# EAGLE board KramerMC_BUS_ferryTALE2020 (EAGLE 6.6.0)
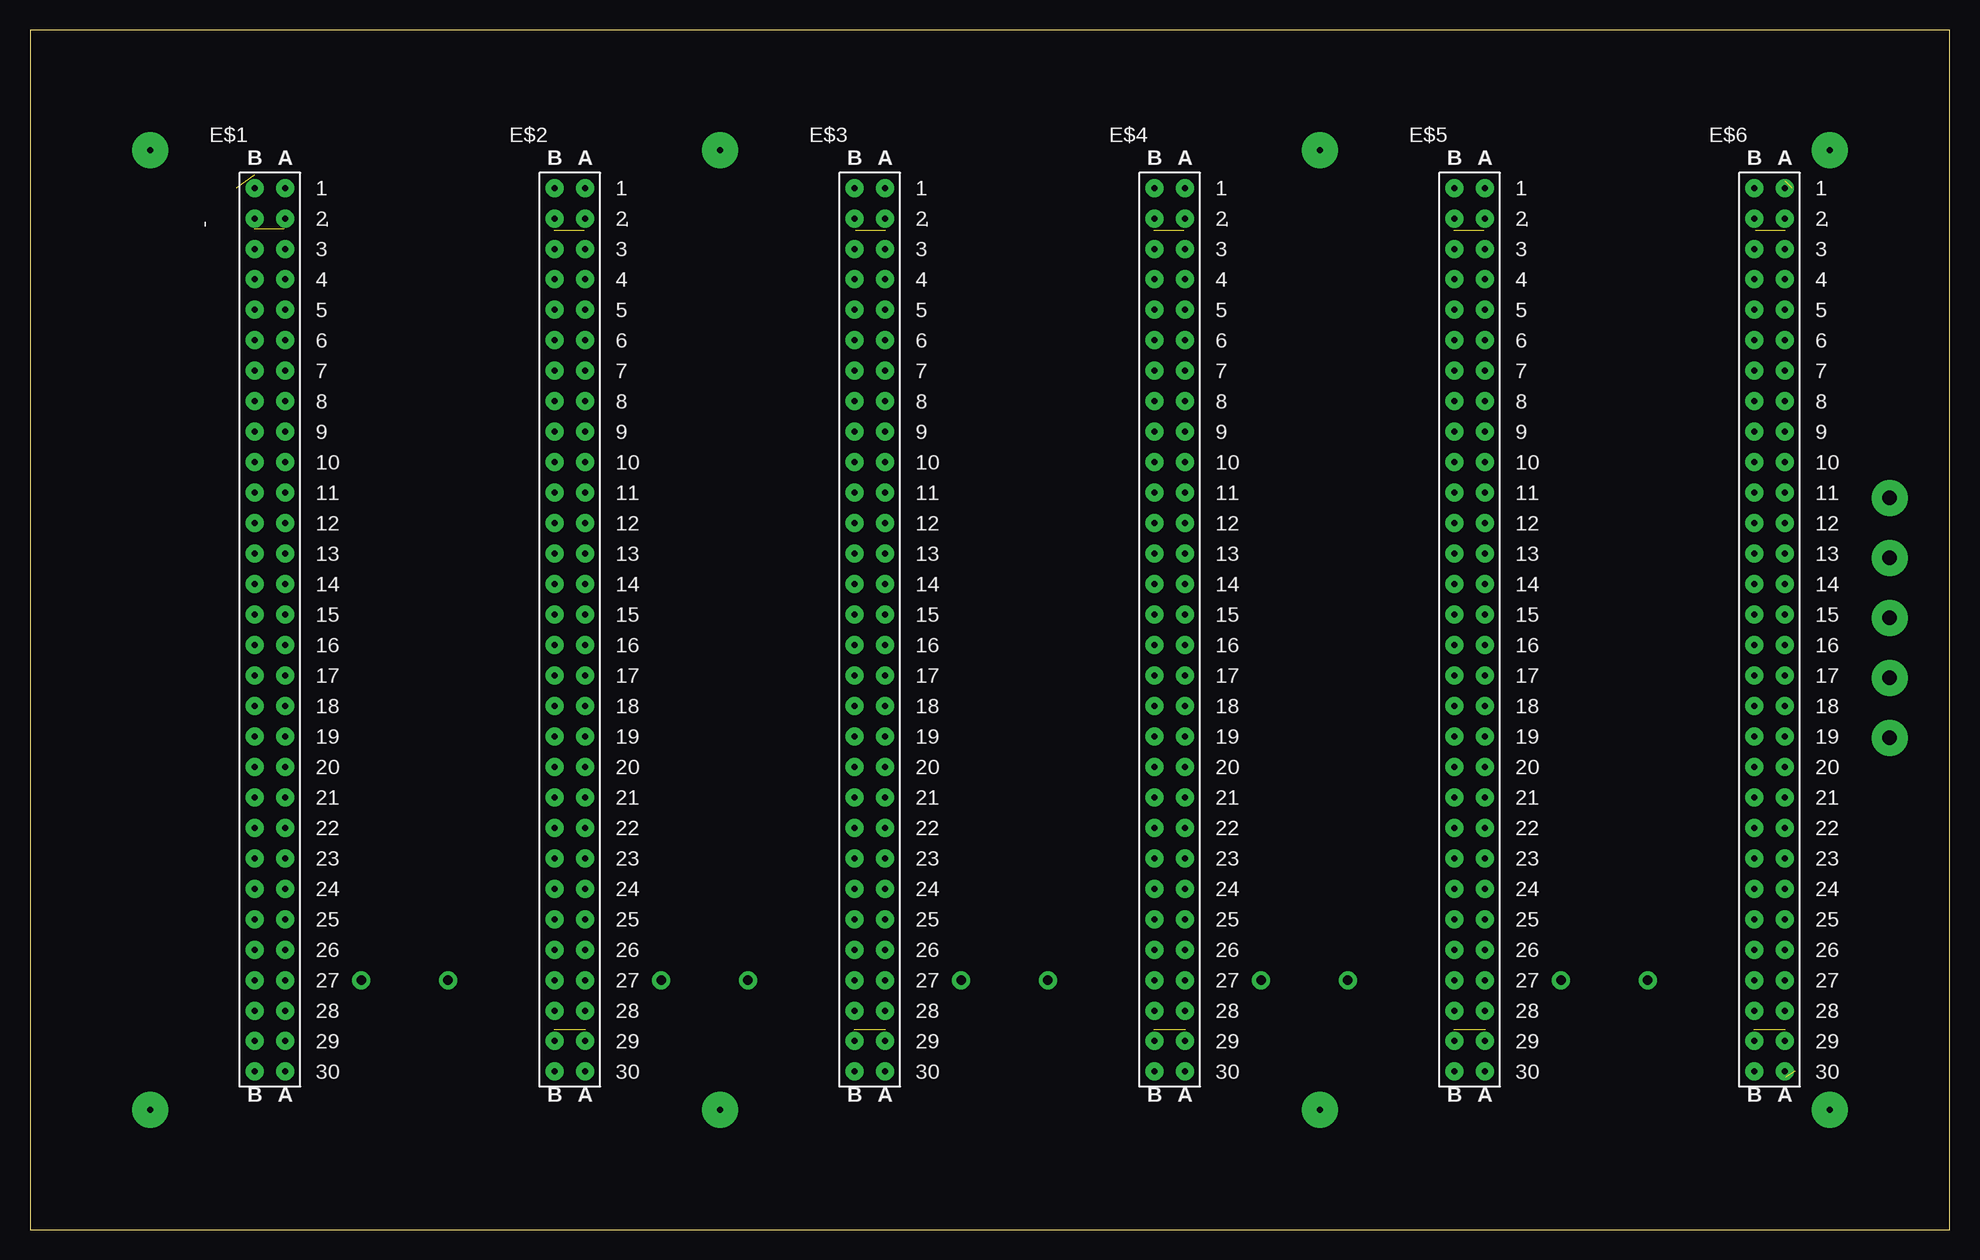
[diagram p0: board, top side]
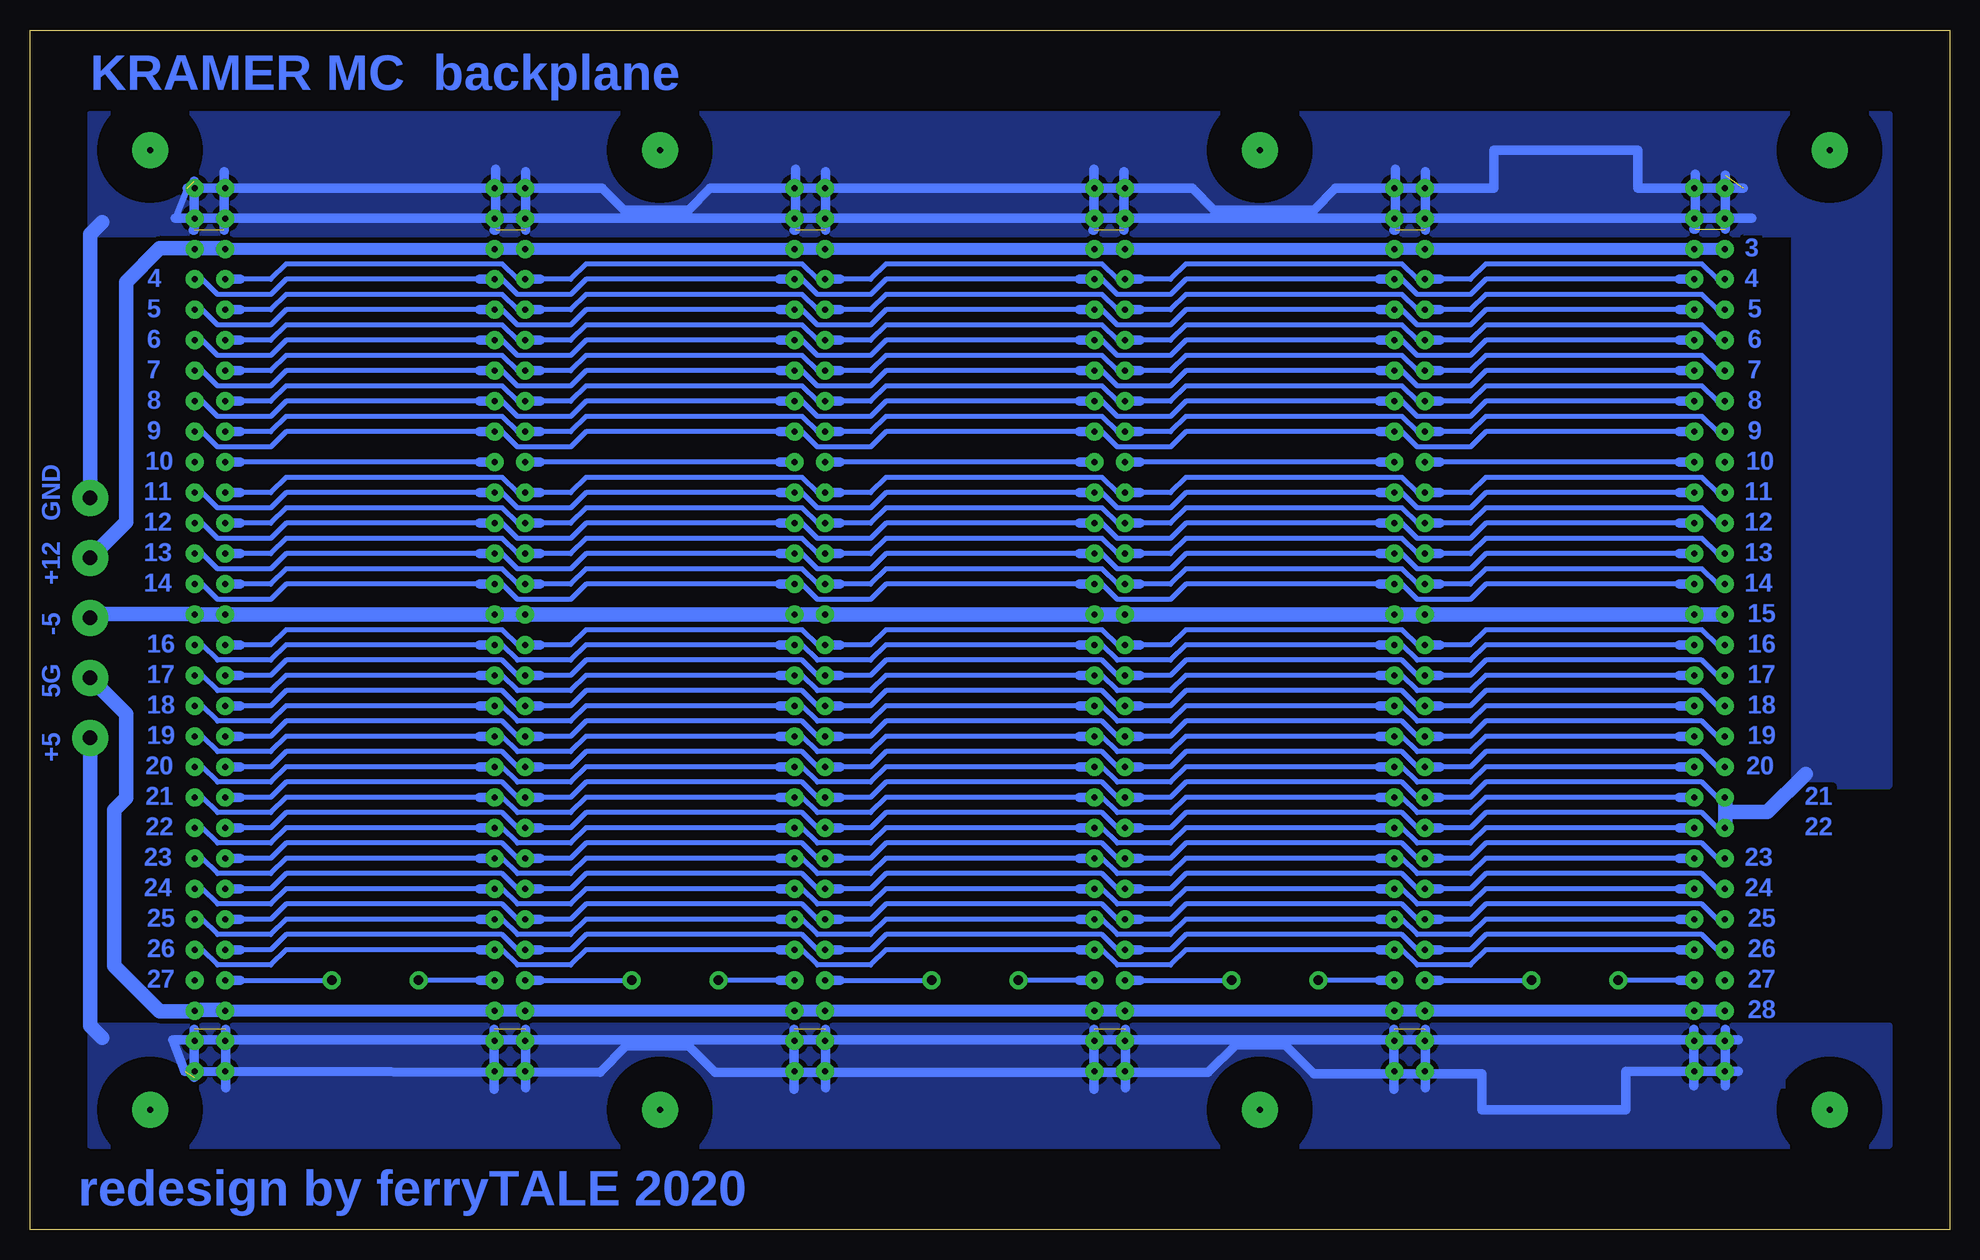
[diagram p1: board, bottom side, seen from below]

Size 160 x 100 mm. Coordinates in mm from the lower left corner, seen from the top.
Outline: 0,0 160,0 160,100 0,100 0,0
Copper layers (1*16): Top 0.035mm / dielectric 1.5mm / Bottom 0.035mm
Design rules "default *": minimum track width 10mil, minimum drill 24mil, track to track 8mil, track to pad 8mil, pad to pad 8mil, via to via 8mil, smd to smd 8mil, copper to edge 40mil, drill to drill 8mil, minimum pad ring 10mil, minimum via ring 8mil, stop-mask expansion 4mil, vias tented up to drill 0mil, thermal gap 10mil
bRestrict: area 6,6 to 14,14; area 146,6 to 154,14; area 146,86 to 154,94; area 6,86 to 14,94; area 103.5,86 to 111.5,94; area 53.5,86 to 61.5,94; area 103.5,6 to 111.5,14; area 53.5,6 to 61.5,14

## Footprints (pad centres in the part's own frame; a part is rotated, then mirrored left to right if it is on the bottom)
FE30-2 = drill 0.5 pad 1.5: A1 -36.83,1.27; A2 -34.29,1.27; A3 -31.75,1.27; A4 -29.21,1.27; A5 -26.67,1.27; A6 -24.13,1.27; A7 -21.59,1.27; A8 -19.05,1.27; A9 -16.51,1.27; A10 -13.97,1.27; A11 -11.43,1.27; A12 -8.89,1.27; A13 -6.35,1.27; A14 -3.81,1.27; A15 -1.27,1.27; A16 1.27,1.27; A17 3.81,1.27; A18 6.35,1.27; A19 8.89,1.27; A20 11.43,1.27; A21 13.97,1.27; A22 16.51,1.27; A23 19.05,1.27; A24 21.59,1.27; A25 24.13,1.27; A26 26.67,1.27; A27 29.21,1.27; A28 31.75,1.27; A29 34.29,1.27; A30 36.83,1.27; B1 -36.83,-1.27; B2 -34.29,-1.27; B3 -31.75,-1.27; B4 -29.21,-1.27; B5 -26.67,-1.27; B6 -24.13,-1.27; B7 -21.59,-1.27; B8 -19.05,-1.27; B9 -16.51,-1.27; B10 -13.97,-1.27; B11 -11.43,-1.27; B12 -8.89,-1.27; B13 -6.35,-1.27; B14 -3.81,-1.27; B15 -1.27,-1.27; B16 1.27,-1.27; B17 3.81,-1.27; B18 6.35,-1.27; B19 8.89,-1.27; B20 11.43,-1.27; B21 13.97,-1.27; B22 16.51,-1.27; B23 19.05,-1.27; B24 21.59,-1.27; B25 24.13,-1.27; B26 26.67,-1.27; B27 29.21,-1.27; B28 31.75,-1.27; B29 34.29,-1.27; B30 36.83,-1.27

## Placement (x,y rotation side)
E$1  [FE30-2]  20,50 270 top
E$2  [FE30-2]  45,50 270 top
E$3  [FE30-2]  70,50 270 top
E$4  [FE30-2]  95,50 270 top
E$5  [FE30-2]  120,50 270 top
E$6  [FE30-2]  145,50 270 top

## Library data of the parts
E$1-E$6 = ferry_Kramer_KC

## Tracks (layer width: path | path; a pad name or v marks a point on that pad's centre or on a via)
+5V  (via drill 1.2 pad 3)  (6 unrouted)
  Bottom 0.8: 18.7,16.7 18.7,12 | 21.3,16.7 21.3,12 | 43.7,16.7 43.7,11.8 | 46.3,16.7 46.3,11.7 | 68.7,16.7 68.7,11.8 | 71.3,16.7 71.3,11.7 | 93.7,16.7 93.7,11.8 | 96.3,16.7 96.3,11.7 | 118.7,16.7 118.7,11.8 | 121.3,16.7 121.3,11.7 | 143.7,16.7 143.7,11.8 | 146.3,16.7 146.3,12.7 | 17.6,15.8 148.1,15.8 147.1,13.2 112.5,13.1 110.3,15.3 105.1,15.3 102.9,13.1 61.8,13.1 59.5,15.4 55.4,15.4 53,13 39,13 39,10 27,10 27,13.2 17.6,13.2
  Bottom 1.2: v155,41 155,17 154,16
  pour Bottom (isolate 0.4, rank 6, no thermals): 5,17 155,17 155,7 5,7
  pour Bottom (rank 6, no thermals): 13.7,17.2 17.7,17.2 17.7,11.8 13.7,11.8
  pour Bottom (rank 6, no thermals): 17.3,12.1 22.8,12.1 22.8,8.4 17.3,8.4
  pour Bottom (rank 6, no thermals): 28,16 38,16 38,11 28,11
GND  (via drill 1.2 pad 3)  (8 unrouted)
  Bottom 0.5: 146.9,86.8 147.9,84.3
  Bottom 0.8: 17.2,86.8 26,86.8 26,90 38,90 38,86.8 51.2,86.8 53,85 61.3,85 63.1,86.8 103.3,86.8 105.1,85 110.5,85 112.3,86.8 146.9,86.8 | 147.9,84.3 16.5,84.3 | 18.7,83.4 18.7,87.9 | 21.3,83.4 21.2,83.4 21.2,88 | 43.7,83.3 43.7,88.2 | 46.3,83.3 46.2,83.3 46.2,88.4 | 68.8,83.3 68.8,88.2 | 71.4,83.3 71.3,83.3 71.3,88.4 | 93.7,83.3 93.7,88.2 | 96.3,83.3 96.2,83.3 96.2,88.4 | 118.7,83.3 118.7,88.2 | 121.3,83.3 121.2,83.3 121.2,88.4 | 143.8,83.3 143.8,88.2 | 146.4,83.3 146.3,83.3 146.3,87.4
  Bottom 1.2: v155,61 155,83 154,84 | 18.7,33.5 18.7,34.8 | 18.7,34.8 18.7,36 | 18.7,34.8 15.2,34.8 12,38
  pour Bottom (isolate 0.4, rank 6, no thermals): 5,93 155,93 155,83 13,83 13,37 5,37
  pour Bottom (rank 6, no thermals): 22.6,91.4 15.8,91.4 15.8,89.8 14,88 13.8,83.1 13.8,82.9 17.1,82.9 17.1,88.3 22.6,88.3
  pour Bottom (rank 6, no thermals): 27,89 37,89 37,84 27,84
S$1
  Bottom 1: 18.73,81.75 21.27,81.75 43.73,81.75
S$2
  Bottom 1: 18.73,18.25 21.27,18.25 43.73,18.25
S$3
  Bottom 0.4: 22.54,63.97 42.46,63.97
  Bottom 0.8: 21.27,63.97 22.54,63.97 | 42.46,63.97 43.73,63.97
S$4  (via drill 0.8 pad 1.5)
  Bottom 0.4: 22.54,20.79 v27.62,20.79
  Bottom 0.8: 21.27,20.79 22.54,20.79
S$5  (via drill 0.8 pad 1.5)
  Bottom 0.4: 42.46,20.79 v34.84,20.79
  Bottom 0.8: 43.73,20.79 42.46,20.79
S$6
  Bottom 0.4: 18.73,79.21 19.36,79.21 20.64,80.48 38.65,80.48 39.92,79.21 42.46,79.21
  Bottom 0.8: 43.73,79.21 42.46,79.21
S$7
  Bottom 0.4: 46.27,79.21 45.63,79.21 44.37,77.94 39.92,77.94 38.65,79.21 22.54,79.21
  Bottom 0.8: 21.27,79.21 22.54,79.21
S$8
  Bottom 0.4: 18.73,76.67 19.36,76.67 20.64,77.94 38.65,77.94 39.92,76.67 42.46,76.67
  Bottom 0.8: 43.73,76.67 42.46,76.67
S$9
  Bottom 0.4: 46.27,76.67 45.63,76.67 44.37,75.4 39.92,75.4 38.65,76.67 22.54,76.67
  Bottom 0.8: 21.27,76.67 22.54,76.67
S$10
  Bottom 0.4: 18.73,74.13 19.36,74.13 20.64,75.4 38.65,75.4 39.92,74.13 42.46,74.13
  Bottom 0.8: 43.73,74.13 42.46,74.13
S$11
  Bottom 0.4: 46.27,74.13 45.63,74.13 44.37,72.86 39.92,72.86 38.65,74.13 22.54,74.13
  Bottom 0.8: 21.27,74.13 22.54,74.13
S$12
  Bottom 0.4: 18.73,71.59 19.36,71.59 20.64,72.86 38.65,72.86 39.92,71.59 42.46,71.59
  Bottom 0.8: 43.73,71.59 42.46,71.59
S$13
  Bottom 0.4: 46.27,71.59 45.63,71.59 44.37,70.32 39.92,70.32 38.65,71.59 22.54,71.59
  Bottom 0.8: 21.27,71.59 22.54,71.59
S$14
  Bottom 0.4: 18.73,69.05 19.36,69.05 20.64,70.32 38.65,70.32 39.92,69.05 42.46,69.05
  Bottom 0.8: 43.73,69.05 42.46,69.05
S$15
  Bottom 0.4: 46.27,69.05 45.63,69.05 44.37,67.78 39.92,67.78 38.65,69.05 22.54,69.05
  Bottom 0.8: 21.27,69.05 22.54,69.05
S$16
  Bottom 0.4: 18.73,66.51 19.36,66.51 20.64,67.78 38.65,67.78 39.92,66.51 42.46,66.51
  Bottom 0.8: 43.73,66.51 42.46,66.51
S$17
  Bottom 0.4: 46.27,66.51 45.63,66.51 44.37,65.24 39.92,65.24 38.65,66.51 22.54,66.51
  Bottom 0.8: 21.27,66.51 22.54,66.51
S$18
  Bottom 0.4: 18.73,61.43 19.36,61.43 20.64,62.7 38.65,62.7 39.92,61.43 42.46,61.43
  Bottom 0.8: 43.73,61.43 42.46,61.43
S$19
  Bottom 0.4: 46.27,61.43 45.63,61.43 44.37,60.16 39.92,60.16 38.65,61.43 22.54,61.43
  Bottom 0.8: 21.27,61.43 22.54,61.43
S$20
  Bottom 0.4: 18.73,58.89 19.36,58.89 20.64,60.16 38.65,60.16 39.92,58.89 42.46,58.89
  Bottom 0.8: 43.73,58.89 42.46,58.89
S$21
  Bottom 0.4: 46.27,58.89 45.63,58.89 44.37,57.62 39.92,57.62 38.65,58.89 22.54,58.89
  Bottom 0.8: 21.27,58.89 22.54,58.89
S$22
  Bottom 0.4: 18.73,56.35 19.36,56.35 20.64,57.62 38.65,57.62 39.92,56.35 42.46,56.35
  Bottom 0.8: 43.73,56.35 42.46,56.35
S$23
  Bottom 0.4: 46.27,56.35 45.63,56.35 44.37,55.08 39.92,55.08 38.65,56.35 22.54,56.35
  Bottom 0.8: 21.27,56.35 22.54,56.35
S$24
  Bottom 0.4: 18.73,53.81 19.36,53.81 20.64,55.08 38.65,55.08 39.92,53.81 42.46,53.81
  Bottom 0.8: 43.73,53.81 42.46,53.81
S$25
  Bottom 0.4: 46.27,53.81 45.63,53.81 44.37,52.54 39.92,52.54 38.65,53.81 22.54,53.81
  Bottom 0.8: 21.27,53.81 22.54,53.81
S$26  (via drill 1.2 pad 3)
  Bottom 1.2: 18.73,51.27 146.27,51.27 146.3,51.3 154.7,51.3 v155,51
S$27
  Bottom 0.4: 18.73,36.03 19.36,36.03 20.64,37.3 38.65,37.3 39.92,36.03 42.46,36.03
  Bottom 0.8: 43.73,36.03 42.46,36.03
S$28
  Bottom 0.4: 18.73,48.73 19.36,48.73 20.64,50 38.65,50 39.92,48.73 42.46,48.73
  Bottom 0.8: 43.73,48.73 42.46,48.73
S$29
  Bottom 0.4: 46.27,48.73 45.63,48.73 44.37,47.46 39.92,47.46 38.65,48.73 22.54,48.73
  Bottom 0.8: 21.27,48.73 22.54,48.73
S$30
  Bottom 0.4: 18.73,46.19 19.36,46.19 20.64,47.46 38.65,47.46 39.92,46.19 42.46,46.19
  Bottom 0.8: 43.73,46.19 42.46,46.19
S$31
  Bottom 0.4: 46.27,46.19 45.63,46.19 44.37,44.92 39.92,44.92 38.65,46.19 22.54,46.19
  Bottom 0.8: 21.27,46.19 22.54,46.19
S$32
  Bottom 0.4: 18.73,43.65 19.36,43.65 20.64,44.92 38.65,44.92 39.92,43.65 42.46,43.65
  Bottom 0.8: 43.73,43.65 42.46,43.65
S$33
  Bottom 0.4: 46.27,43.65 45.63,43.65 44.37,42.38 39.92,42.38 38.65,43.65 22.54,43.65
  Bottom 0.8: 21.27,43.65 22.54,43.65
S$34
  Bottom 0.4: 18.73,41.11 19.36,41.11 20.64,42.38 38.65,42.38 39.92,41.11 42.46,41.11
  Bottom 0.8: 43.73,41.11 42.46,41.11
S$35
  Bottom 0.4: 46.27,41.11 45.63,41.11 44.37,39.84 39.92,39.84 38.65,41.11 22.54,41.11
  Bottom 0.8: 21.27,41.11 22.54,41.11
S$36
  Bottom 0.4: 18.73,38.57 19.36,38.57 20.64,39.84 38.65,39.84 39.92,38.57 42.46,38.57
  Bottom 0.8: 43.73,38.57 42.46,38.57
S$37
  Bottom 0.4: 46.27,38.57 45.63,38.57 44.37,37.3 39.92,37.3 38.65,38.57 22.54,38.57
  Bottom 0.8: 21.27,38.57 22.54,38.57
S$38
  Bottom 0.4: 18.73,30.95 19.36,30.95 20.64,32.22 38.65,32.22 39.92,30.95 42.46,30.95
  Bottom 0.8: 43.73,30.95 42.46,30.95
S$39
  Bottom 0.4: 46.27,36.03 45.63,36.03 44.37,34.76 39.92,34.76 38.65,36.03 22.54,36.03
  Bottom 0.8: 21.27,36.03 22.54,36.03
S$40
  Bottom 1: 43.73,81.75 46.27,81.75 68.73,81.75
S$41
  Bottom 0.4: 46.27,33.49 45.63,33.49 44.37,32.22 39.92,32.22 38.65,33.49 22.54,33.49
  Bottom 0.8: 21.27,33.49 22.54,33.49
S$42
  Bottom 1: 43.73,18.25 46.27,18.25 68.73,18.25
S$43
  Bottom 0.4: 46.27,30.95 45.63,30.95 44.37,29.68 39.92,29.68 38.65,30.95 22.54,30.95
  Bottom 0.8: 21.27,30.95 22.54,30.95
S$44
  Bottom 0.4: 18.73,28.41 19.36,28.41 20.64,29.68 38.65,29.68 39.92,28.41 42.46,28.41
  Bottom 0.8: 43.73,28.41 42.46,28.41
S$45
  Bottom 0.4: 46.27,28.41 45.63,28.41 44.37,27.14 39.92,27.14 38.65,28.41 22.54,28.41
  Bottom 0.8: 21.27,28.41 22.54,28.41
S$46
  Bottom 0.4: 18.73,25.87 19.36,25.87 20.64,27.14 38.65,27.14 39.92,25.87 42.46,25.87
  Bottom 0.8: 43.73,25.87 42.46,25.87
S$47
  Bottom 0.4: 46.27,25.87 45.63,25.87 44.37,24.6 39.92,24.6 38.65,25.87 22.54,25.87
  Bottom 0.8: 21.27,25.87 22.54,25.87
S$48
  Bottom 0.4: 18.73,23.33 19.36,23.33 20.64,24.6 38.65,24.6 39.92,23.33 42.46,23.33
  Bottom 0.8: 43.73,23.33 42.46,23.33
S$49
  Bottom 0.4: 46.27,23.33 45.63,23.33 44.37,22.06 39.92,22.06 38.65,23.33 22.54,23.33
  Bottom 0.8: 21.27,23.33 22.54,23.33
S$50
  Bottom 0.4: 47.54,63.97 67.46,63.97
  Bottom 0.8: 46.27,63.97 47.54,63.97 | 67.46,63.97 68.73,63.97
S$51  (via drill 0.8 pad 1.5)
  Bottom 0.4: 47.54,20.79 v52.62,20.79
  Bottom 0.8: 46.27,20.79 47.54,20.79
S$52  (via drill 0.8 pad 1.5)
  Bottom 0.4: 67.46,20.79 v59.84,20.79
  Bottom 0.8: 68.73,20.79 67.46,20.79
S$53
  Bottom 0.4: 43.73,79.21 44.37,79.21 45.63,80.48 63.65,80.48 64.92,79.21 67.46,79.21
  Bottom 0.8: 68.73,79.21 67.46,79.21
S$54
  Bottom 0.4: 71.27,79.21 70.64,79.21 69.36,77.94 64.92,77.94 63.65,79.21 47.54,79.21
  Bottom 0.8: 46.27,79.21 47.54,79.21
S$55
  Bottom 0.4: 43.73,76.67 44.37,76.67 45.63,77.94 63.65,77.94 64.92,76.67 67.46,76.67
  Bottom 0.8: 68.73,76.67 67.46,76.67
S$56
  Bottom 0.4: 71.27,76.67 70.64,76.67 69.36,75.4 64.92,75.4 63.65,76.67 47.54,76.67
  Bottom 0.8: 46.27,76.67 47.54,76.67
S$57
  Bottom 0.4: 43.73,74.13 44.37,74.13 45.63,75.4 63.65,75.4 64.92,74.13 67.46,74.13
  Bottom 0.8: 68.73,74.13 67.46,74.13
S$58
  Bottom 0.4: 71.27,74.13 70.64,74.13 69.36,72.86 64.92,72.86 63.65,74.13 47.54,74.13
  Bottom 0.8: 46.27,74.13 47.54,74.13
S$59
  Bottom 0.4: 43.73,71.59 44.37,71.59 45.63,72.86 63.65,72.86 64.92,71.59 67.46,71.59
  Bottom 0.8: 68.73,71.59 67.46,71.59
S$60
  Bottom 0.4: 71.27,71.59 70.64,71.59 69.36,70.32 64.92,70.32 63.65,71.59 47.54,71.59
  Bottom 0.8: 46.27,71.59 47.54,71.59
S$61
  Bottom 0.4: 43.73,69.05 44.37,69.05 45.63,70.32 63.65,70.32 64.92,69.05 67.46,69.05
  Bottom 0.8: 68.73,69.05 67.46,69.05
S$62
  Bottom 0.4: 71.27,69.05 70.64,69.05 69.36,67.78 64.92,67.78 63.65,69.05 47.54,69.05
  Bottom 0.8: 46.27,69.05 47.54,69.05
S$63
  Bottom 0.4: 43.73,66.51 44.37,66.51 45.63,67.78 63.65,67.78 64.92,66.51 67.46,66.51
  Bottom 0.8: 68.73,66.51 67.46,66.51
S$64
  Bottom 0.4: 71.27,66.51 70.64,66.51 69.36,65.24 64.92,65.24 63.65,66.51 47.54,66.51
  Bottom 0.8: 46.27,66.51 47.54,66.51
S$65
  Bottom 0.4: 43.73,61.43 44.37,61.43 45.63,62.7 63.65,62.7 64.92,61.43 67.46,61.43
  Bottom 0.8: 68.73,61.43 67.46,61.43
S$66
  Bottom 0.4: 71.27,61.43 70.64,61.43 69.36,60.16 64.92,60.16 63.65,61.43 47.54,61.43
  Bottom 0.8: 46.27,61.43 47.54,61.43
S$67
  Bottom 0.4: 43.73,58.89 44.37,58.89 45.63,60.16 63.65,60.16 64.92,58.89 67.46,58.89
  Bottom 0.8: 68.73,58.89 67.46,58.89
S$68
  Bottom 0.4: 71.27,58.89 70.64,58.89 69.36,57.62 64.92,57.62 63.65,58.89 47.54,58.89
  Bottom 0.8: 46.27,58.89 47.54,58.89
S$69
  Bottom 0.4: 43.73,56.35 44.37,56.35 45.63,57.62 63.65,57.62 64.92,56.35 67.46,56.35
  Bottom 0.8: 68.73,56.35 67.46,56.35
S$70
  Bottom 0.4: 71.27,56.35 70.64,56.35 69.36,55.08 64.92,55.08 63.65,56.35 47.54,56.35
  Bottom 0.8: 46.27,56.35 47.54,56.35
S$71
  Bottom 0.4: 43.73,53.81 44.37,53.81 45.63,55.08 63.65,55.08 64.92,53.81 67.46,53.81
  Bottom 0.8: 68.73,53.81 67.46,53.81
S$72
  Bottom 0.4: 71.27,53.81 70.64,53.81 69.36,52.54 64.92,52.54 63.65,53.81 47.54,53.81
  Bottom 0.8: 46.27,53.81 47.54,53.81
S$73
  Bottom 0.4: 18.73,33.49 19.36,33.49 20.64,34.76 38.65,34.76 39.92,33.49 42.46,33.49
  Bottom 0.8: 43.73,33.49 42.46,33.49
S$74
  Bottom 0.4: 43.73,36.03 44.37,36.03 45.63,37.3 63.65,37.3 64.92,36.03 67.46,36.03
  Bottom 0.8: 68.73,36.03 67.46,36.03
S$75
  Bottom 0.4: 43.73,48.73 44.37,48.73 45.63,50 63.65,50 64.92,48.73 67.46,48.73
  Bottom 0.8: 68.73,48.73 67.46,48.73
S$76
  Bottom 0.4: 71.27,48.73 70.64,48.73 69.36,47.46 64.92,47.46 63.65,48.73 47.54,48.73
  Bottom 0.8: 46.27,48.73 47.54,48.73
S$77
  Bottom 0.4: 43.73,46.19 44.37,46.19 45.63,47.46 63.65,47.46 64.92,46.19 67.46,46.19
  Bottom 0.8: 68.73,46.19 67.46,46.19
S$78
  Bottom 0.4: 71.27,46.19 70.64,46.19 69.36,44.92 64.92,44.92 63.65,46.19 47.54,46.19
  Bottom 0.8: 46.27,46.19 47.54,46.19
S$79
  Bottom 0.4: 43.73,43.65 44.37,43.65 45.63,44.92 63.65,44.92 64.92,43.65 67.46,43.65
  Bottom 0.8: 68.73,43.65 67.46,43.65
S$80
  Bottom 0.4: 71.27,43.65 70.64,43.65 69.36,42.38 64.92,42.38 63.65,43.65 47.54,43.65
  Bottom 0.8: 46.27,43.65 47.54,43.65
S$81
  Bottom 0.4: 43.73,41.11 44.37,41.11 45.63,42.38 63.65,42.38 64.92,41.11 67.46,41.11
  Bottom 0.8: 68.73,41.11 67.46,41.11
S$82
  Bottom 0.4: 71.27,41.11 70.64,41.11 69.36,39.84 64.92,39.84 63.65,41.11 47.54,41.11
  Bottom 0.8: 46.27,41.11 47.54,41.11
S$83
  Bottom 0.4: 43.73,38.57 44.37,38.57 45.63,39.84 63.65,39.84 64.92,38.57 67.46,38.57
  Bottom 0.8: 68.73,38.57 67.46,38.57
S$84
  Bottom 0.4: 71.27,38.57 70.64,38.57 69.36,37.3 64.92,37.3 63.65,38.57 47.54,38.57
  Bottom 0.8: 46.27,38.57 47.54,38.57
S$85
  Bottom 0.4: 43.73,30.95 44.37,30.95 45.63,32.22 63.65,32.22 64.92,30.95 67.46,30.95
  Bottom 0.8: 68.73,30.95 67.46,30.95
S$86
  Bottom 0.4: 71.27,36.03 70.64,36.03 69.36,34.76 64.92,34.76 63.65,36.03 47.54,36.03
  Bottom 0.8: 46.27,36.03 47.54,36.03
S$87
  Bottom 0.4: 71.27,33.49 70.64,33.49 69.36,32.22 64.92,32.22 63.65,33.49 47.54,33.49
  Bottom 0.8: 46.27,33.49 47.54,33.49
S$88
  Bottom 0.4: 71.27,30.95 70.64,30.95 69.36,29.68 64.92,29.68 63.65,30.95 47.54,30.95
  Bottom 0.8: 46.27,30.95 47.54,30.95
S$89
  Bottom 0.4: 43.73,28.41 44.37,28.41 45.63,29.68 63.65,29.68 64.92,28.41 67.46,28.41
  Bottom 0.8: 68.73,28.41 67.46,28.41
S$90
  Bottom 0.4: 71.27,28.41 70.64,28.41 69.36,27.14 64.92,27.14 63.65,28.41 47.54,28.41
  Bottom 0.8: 46.27,28.41 47.54,28.41
S$91
  Bottom 0.4: 43.73,25.87 44.37,25.87 45.63,27.14 63.65,27.14 64.92,25.87 67.46,25.87
  Bottom 0.8: 68.73,25.87 67.46,25.87
S$92
  Bottom 0.4: 71.27,25.87 70.64,25.87 69.36,24.6 64.92,24.6 63.65,25.87 47.54,25.87
  Bottom 0.8: 46.27,25.87 47.54,25.87
S$93
  Bottom 0.4: 43.73,23.33 44.37,23.33 45.63,24.6 63.65,24.6 64.92,23.33 67.46,23.33
  Bottom 0.8: 68.73,23.33 67.46,23.33
S$94
  Bottom 0.4: 71.27,23.33 70.64,23.33 69.36,22.06 64.92,22.06 63.65,23.33 47.54,23.33
  Bottom 0.8: 46.27,23.33 47.54,23.33
S$95
  Bottom 1: 68.73,81.75 71.27,81.75 93.73,81.75
S$96
  Bottom 1: 68.73,18.25 71.27,18.25 93.73,18.25
S$97
  Bottom 0.4: 72.54,63.97 92.46,63.97
  Bottom 0.8: 71.27,63.97 72.54,63.97 | 92.46,63.97 93.73,63.97
S$98  (via drill 0.8 pad 1.5)
  Bottom 0.4: 72.54,20.79 v77.62,20.79
  Bottom 0.8: 71.27,20.79 72.54,20.79
S$99  (via drill 0.8 pad 1.5)
  Bottom 0.4: 92.46,20.79 v84.84,20.79
  Bottom 0.8: 93.73,20.79 92.46,20.79
S$100
  Bottom 0.4: 68.73,79.21 69.36,79.21 70.64,80.48 88.65,80.48 89.92,79.21 92.46,79.21
  Bottom 0.8: 93.73,79.21 92.46,79.21
S$101
  Bottom 0.4: 96.27,79.21 95.64,79.21 94.36,77.94 89.92,77.94 88.65,79.21 72.54,79.21
  Bottom 0.8: 71.27,79.21 72.54,79.21
S$102
  Bottom 0.4: 68.73,76.67 69.36,76.67 70.64,77.94 88.65,77.94 89.92,76.67 92.46,76.67
  Bottom 0.8: 93.73,76.67 92.46,76.67
S$103
  Bottom 0.4: 96.27,76.67 95.64,76.67 94.36,75.4 89.92,75.4 88.65,76.67 72.54,76.67
  Bottom 0.8: 71.27,76.67 72.54,76.67
S$104
  Bottom 0.4: 68.73,74.13 69.36,74.13 70.64,75.4 88.65,75.4 89.92,74.13 92.46,74.13
  Bottom 0.8: 93.73,74.13 92.46,74.13
S$105
  Bottom 0.4: 96.27,74.13 95.64,74.13 94.36,72.86 89.92,72.86 88.65,74.13 72.54,74.13
  Bottom 0.8: 71.27,74.13 72.54,74.13
S$106
  Bottom 0.4: 68.73,71.59 69.36,71.59 70.64,72.86 88.65,72.86 89.92,71.59 92.46,71.59
  Bottom 0.8: 93.73,71.59 92.46,71.59
S$107
  Bottom 0.4: 96.27,71.59 95.64,71.59 94.36,70.32 89.92,70.32 88.65,71.59 72.54,71.59
  Bottom 0.8: 71.27,71.59 72.54,71.59
S$108
  Bottom 0.4: 68.73,69.05 69.36,69.05 70.64,70.32 88.65,70.32 89.92,69.05 92.46,69.05
  Bottom 0.8: 93.73,69.05 92.46,69.05
S$109
  Bottom 0.4: 96.27,69.05 95.64,69.05 94.36,67.78 89.92,67.78 88.65,69.05 72.54,69.05
  Bottom 0.8: 71.27,69.05 72.54,69.05
S$110
  Bottom 0.4: 68.73,66.51 69.36,66.51 70.64,67.78 88.65,67.78 89.92,66.51 92.46,66.51
  Bottom 0.8: 93.73,66.51 92.46,66.51
S$111
  Bottom 0.4: 96.27,66.51 95.64,66.51 94.36,65.24 89.92,65.24 88.65,66.51 72.54,66.51
  Bottom 0.8: 71.27,66.51 72.54,66.51
S$112
  Bottom 0.4: 68.73,61.43 69.36,61.43 70.64,62.7 88.65,62.7 89.92,61.43 92.46,61.43
  Bottom 0.8: 93.73,61.43 92.46,61.43
S$113
  Bottom 0.4: 96.27,61.43 95.64,61.43 94.36,60.16 89.92,60.16 88.65,61.43 72.54,61.43
  Bottom 0.8: 71.27,61.43 72.54,61.43
S$114
  Bottom 0.4: 68.73,58.89 69.36,58.89 70.64,60.16 88.65,60.16 89.92,58.89 92.46,58.89
  Bottom 0.8: 93.73,58.89 92.46,58.89
S$115
  Bottom 0.4: 96.27,58.89 95.64,58.89 94.36,57.62 89.92,57.62 88.65,58.89 72.54,58.89
  Bottom 0.8: 71.27,58.89 72.54,58.89
S$116
  Bottom 0.4: 68.73,56.35 69.36,56.35 70.64,57.62 88.65,57.62 89.92,56.35 92.46,56.35
  Bottom 0.8: 93.73,56.35 92.46,56.35
S$117
  Bottom 0.4: 96.27,56.35 95.64,56.35 94.36,55.08 89.92,55.08 88.65,56.35 72.54,56.35
  Bottom 0.8: 71.27,56.35 72.54,56.35
S$118
  Bottom 0.4: 68.73,53.81 69.36,53.81 70.64,55.08 88.65,55.08 89.92,53.81 92.46,53.81
  Bottom 0.8: 93.73,53.81 92.46,53.81
S$119
  Bottom 0.4: 96.27,53.81 95.64,53.81 94.36,52.54 89.92,52.54 88.65,53.81 72.54,53.81
  Bottom 0.8: 71.27,53.81 72.54,53.81
S$120
  Bottom 0.4: 43.73,33.49 44.37,33.49 45.63,34.76 63.65,34.76 64.92,33.49 67.46,33.49
  Bottom 0.8: 68.73,33.49 67.46,33.49
S$121
  Bottom 0.4: 68.73,36.03 69.36,36.03 70.64,37.3 88.65,37.3 89.92,36.03 92.46,36.03
  Bottom 0.8: 93.73,36.03 92.46,36.03
S$122
  Bottom 0.4: 68.73,48.73 69.36,48.73 70.64,50 88.65,50 89.92,48.73 92.46,48.73
  Bottom 0.8: 93.73,48.73 92.46,48.73
S$123
  Bottom 0.4: 96.27,48.73 95.64,48.73 94.36,47.46 89.92,47.46 88.65,48.73 72.54,48.73
  Bottom 0.8: 71.27,48.73 72.54,48.73
S$124
  Bottom 0.4: 68.73,46.19 69.36,46.19 70.64,47.46 88.65,47.46 89.92,46.19 92.46,46.19
  Bottom 0.8: 93.73,46.19 92.46,46.19
S$125
  Bottom 0.4: 96.27,46.19 95.64,46.19 94.36,44.92 89.92,44.92 88.65,46.19 72.54,46.19
  Bottom 0.8: 71.27,46.19 72.54,46.19
S$126
  Bottom 0.4: 68.73,43.65 69.36,43.65 70.64,44.92 88.65,44.92 89.92,43.65 92.46,43.65
  Bottom 0.8: 93.73,43.65 92.46,43.65
S$127
  Bottom 0.4: 96.27,43.65 95.64,43.65 94.36,42.38 89.92,42.38 88.65,43.65 72.54,43.65
  Bottom 0.8: 71.27,43.65 72.54,43.65
S$128
  Bottom 0.4: 68.73,41.11 69.36,41.11 70.64,42.38 88.65,42.38 89.92,41.11 92.46,41.11
  Bottom 0.8: 93.73,41.11 92.46,41.11
S$129
  Bottom 0.4: 96.27,41.11 95.64,41.11 94.36,39.84 89.92,39.84 88.65,41.11 72.54,41.11
  Bottom 0.8: 71.27,41.11 72.54,41.11
S$130
  Bottom 0.4: 68.73,38.57 69.36,38.57 70.64,39.84 88.65,39.84 89.92,38.57 92.46,38.57
  Bottom 0.8: 93.73,38.57 92.46,38.57
S$131
  Bottom 0.4: 96.27,38.57 95.64,38.57 94.36,37.3 89.92,37.3 88.65,38.57 72.54,38.57
  Bottom 0.8: 71.27,38.57 72.54,38.57
S$132
  Bottom 0.4: 68.73,30.95 69.36,30.95 70.64,32.22 88.65,32.22 89.92,30.95 92.46,30.95
  Bottom 0.8: 93.73,30.95 92.46,30.95
S$133
  Bottom 0.4: 96.27,36.03 95.64,36.03 94.36,34.76 89.92,34.76 88.65,36.03 72.54,36.03
  Bottom 0.8: 71.27,36.03 72.54,36.03
S$134
  Bottom 0.4: 96.27,33.49 95.64,33.49 94.36,32.22 89.92,32.22 88.65,33.49 72.54,33.49
  Bottom 0.8: 71.27,33.49 72.54,33.49
S$135
  Bottom 0.4: 96.27,30.95 95.64,30.95 94.36,29.68 89.92,29.68 88.65,30.95 72.54,30.95
  Bottom 0.8: 71.27,30.95 72.54,30.95
S$136
  Bottom 0.4: 68.73,28.41 69.36,28.41 70.64,29.68 88.65,29.68 89.92,28.41 92.46,28.41
  Bottom 0.8: 93.73,28.41 92.46,28.41
S$137
  Bottom 0.4: 96.27,28.41 95.64,28.41 94.36,27.14 89.92,27.14 88.65,28.41 72.54,28.41
  Bottom 0.8: 71.27,28.41 72.54,28.41
S$138
  Bottom 0.4: 68.73,25.87 69.36,25.87 70.64,27.14 88.65,27.14 89.92,25.87 92.46,25.87
  Bottom 0.8: 93.73,25.87 92.46,25.87
S$139
  Bottom 0.4: 96.27,25.87 95.64,25.87 94.36,24.6 89.92,24.6 88.65,25.87 72.54,25.87
  Bottom 0.8: 71.27,25.87 72.54,25.87
S$140
  Bottom 0.4: 68.73,23.33 69.36,23.33 70.64,24.6 88.65,24.6 89.92,23.33 92.46,23.33
  Bottom 0.8: 93.73,23.33 92.46,23.33
S$141
  Bottom 0.4: 96.27,23.33 95.64,23.33 94.36,22.06 89.92,22.06 88.65,23.33 72.54,23.33
  Bottom 0.8: 71.27,23.33 72.54,23.33
S$142
  Bottom 1: 93.73,81.75 96.27,81.75 118.73,81.75
S$143
  Bottom 1: 93.73,18.25 96.27,18.25 118.73,18.25
S$144
  Bottom 0.4: 97.54,63.97 117.46,63.97
  Bottom 0.8: 96.27,63.97 97.54,63.97 | 117.46,63.97 118.73,63.97
S$145  (via drill 0.8 pad 1.5)
  Bottom 0.4: 97.54,20.79 v102.62,20.79
  Bottom 0.8: 96.27,20.79 97.54,20.79
S$146  (via drill 0.8 pad 1.5)
  Bottom 0.4: 117.46,20.79 v109.84,20.79
  Bottom 0.8: 118.73,20.79 117.46,20.79
S$147
  Bottom 0.4: 93.73,79.21 94.36,79.21 95.64,80.48 113.65,80.48 114.92,79.21 117.46,79.21
  Bottom 0.8: 118.73,79.21 117.46,79.21
S$148
  Bottom 0.4: 121.27,79.21 120.64,79.21 119.36,77.94 114.92,77.94 113.65,79.21 97.54,79.21
  Bottom 0.8: 96.27,79.21 97.54,79.21
S$149
  Bottom 0.4: 93.73,76.67 94.36,76.67 95.64,77.94 113.65,77.94 114.92,76.67 117.46,76.67
  Bottom 0.8: 118.73,76.67 117.46,76.67
S$150
  Bottom 0.4: 121.27,76.67 120.64,76.67 119.36,75.4 114.92,75.4 113.65,76.67 97.54,76.67
  Bottom 0.8: 96.27,76.67 97.54,76.67
S$151
  Bottom 0.4: 93.73,74.13 94.36,74.13 95.64,75.4 113.65,75.4 114.92,74.13 117.46,74.13
  Bottom 0.8: 118.73,74.13 117.46,74.13
S$152
  Bottom 0.4: 121.27,74.13 120.64,74.13 119.36,72.86 114.92,72.86 113.65,74.13 97.54,74.13
  Bottom 0.8: 96.27,74.13 97.54,74.13
S$153
  Bottom 0.4: 93.73,71.59 94.36,71.59 95.64,72.86 113.65,72.86 114.92,71.59 117.46,71.59
  Bottom 0.8: 118.73,71.59 117.46,71.59
S$154
  Bottom 0.4: 121.27,71.59 120.64,71.59 119.36,70.32 114.92,70.32 113.65,71.59 97.54,71.59
  Bottom 0.8: 96.27,71.59 97.54,71.59
S$155
  Bottom 0.4: 93.73,69.05 94.36,69.05 95.64,70.32 113.65,70.32 114.92,69.05 117.46,69.05
  Bottom 0.8: 118.73,69.05 117.46,69.05
S$156
  Bottom 0.4: 121.27,69.05 120.64,69.05 119.36,67.78 114.92,67.78 113.65,69.05 97.54,69.05
  Bottom 0.8: 96.27,69.05 97.54,69.05
S$157
  Bottom 0.4: 93.73,66.51 94.36,66.51 95.64,67.78 113.65,67.78 114.92,66.51 117.46,66.51
  Bottom 0.8: 118.73,66.51 117.46,66.51
S$158
  Bottom 0.4: 121.27,66.51 120.64,66.51 119.36,65.24 114.92,65.24 113.65,66.51 97.54,66.51
  Bottom 0.8: 96.27,66.51 97.54,66.51
S$159
  Bottom 0.4: 93.73,61.43 94.36,61.43 95.64,62.7 113.65,62.7 114.92,61.43 117.46,61.43
  Bottom 0.8: 118.73,61.43 117.46,61.43
S$160
  Bottom 0.4: 121.27,61.43 120.64,61.43 119.36,60.16 114.92,60.16 113.65,61.43 97.54,61.43
  Bottom 0.8: 96.27,61.43 97.54,61.43
S$161
  Bottom 0.4: 93.73,58.89 94.36,58.89 95.64,60.16 113.65,60.16 114.92,58.89 117.46,58.89
  Bottom 0.8: 118.73,58.89 117.46,58.89
S$162
  Bottom 0.4: 121.27,58.89 120.64,58.89 119.36,57.62 114.92,57.62 113.65,58.89 97.54,58.89
  Bottom 0.8: 96.27,58.89 97.54,58.89
S$163
  Bottom 0.4: 93.73,56.35 94.36,56.35 95.64,57.62 113.65,57.62 114.92,56.35 117.46,56.35
  Bottom 0.8: 118.73,56.35 117.46,56.35
S$164
  Bottom 0.4: 121.27,56.35 120.64,56.35 119.36,55.08 114.92,55.08 113.65,56.35 97.54,56.35
  Bottom 0.8: 96.27,56.35 97.54,56.35
S$165
  Bottom 0.4: 93.73,53.81 94.36,53.81 95.64,55.08 113.65,55.08 114.92,53.81 117.46,53.81
  Bottom 0.8: 118.73,53.81 117.46,53.81
S$166
  Bottom 0.4: 121.27,53.81 120.64,53.81 119.36,52.54 114.92,52.54 113.65,53.81 97.54,53.81
  Bottom 0.8: 96.27,53.81 97.54,53.81
S$167
  Bottom 0.4: 68.73,33.49 69.36,33.49 70.64,34.76 88.65,34.76 89.92,33.49 92.46,33.49
  Bottom 0.8: 93.73,33.49 92.46,33.49
S$168
  Bottom 0.4: 93.73,36.03 94.36,36.03 95.64,37.3 113.65,37.3 114.92,36.03 117.46,36.03
  Bottom 0.8: 118.73,36.03 117.46,36.03
S$169
  Bottom 0.4: 93.73,48.73 94.36,48.73 95.64,50 113.65,50 114.92,48.73 117.46,48.73
  Bottom 0.8: 118.73,48.73 117.46,48.73
S$170
  Bottom 0.4: 121.27,48.73 120.64,48.73 119.36,47.46 114.92,47.46 113.65,48.73 97.54,48.73
  Bottom 0.8: 96.27,48.73 97.54,48.73
S$171
  Bottom 0.4: 93.73,46.19 94.36,46.19 95.64,47.46 113.65,47.46 114.92,46.19 117.46,46.19
  Bottom 0.8: 118.73,46.19 117.46,46.19
S$172
  Bottom 0.4: 121.27,46.19 120.64,46.19 119.36,44.92 114.92,44.92 113.65,46.19 97.54,46.19
  Bottom 0.8: 96.27,46.19 97.54,46.19
S$173
  Bottom 0.4: 93.73,43.65 94.36,43.65 95.64,44.92 113.65,44.92 114.92,43.65 117.46,43.65
  Bottom 0.8: 118.73,43.65 117.46,43.65
S$174
  Bottom 0.4: 121.27,43.65 120.64,43.65 119.36,42.38 114.92,42.38 113.65,43.65 97.54,43.65
  Bottom 0.8: 96.27,43.65 97.54,43.65
S$175
  Bottom 0.4: 93.73,41.11 94.36,41.11 95.64,42.38 113.65,42.38 114.92,41.11 117.46,41.11
  Bottom 0.8: 118.73,41.11 117.46,41.11
S$176
  Bottom 0.4: 121.27,41.11 120.64,41.11 119.36,39.84 114.92,39.84 113.65,41.11 97.54,41.11
  Bottom 0.8: 96.27,41.11 97.54,41.11
S$177
  Bottom 0.4: 93.73,38.57 94.36,38.57 95.64,39.84 113.65,39.84 114.92,38.57 117.46,38.57
  Bottom 0.8: 118.73,38.57 117.46,38.57
S$178
  Bottom 0.4: 121.27,38.57 120.64,38.57 119.36,37.3 114.92,37.3 113.65,38.57 97.54,38.57
  Bottom 0.8: 96.27,38.57 97.54,38.57
S$179
  Bottom 0.4: 93.73,30.95 94.36,30.95 95.64,32.22 113.65,32.22 114.92,30.95 117.46,30.95
  Bottom 0.8: 118.73,30.95 117.46,30.95
S$180
  Bottom 0.4: 121.27,36.03 120.64,36.03 119.36,34.76 114.92,34.76 113.65,36.03 97.54,36.03
  Bottom 0.8: 96.27,36.03 97.54,36.03
S$181
  Bottom 0.4: 121.27,33.49 120.64,33.49 119.36,32.22 114.92,32.22 113.65,33.49 97.54,33.49
  Bottom 0.8: 96.27,33.49 97.54,33.49
S$182
  Bottom 0.4: 121.27,30.95 120.64,30.95 119.36,29.68 114.92,29.68 113.65,30.95 97.54,30.95
  Bottom 0.8: 96.27,30.95 97.54,30.95
S$183
  Bottom 0.4: 93.73,28.41 94.36,28.41 95.64,29.68 113.65,29.68 114.92,28.41 117.46,28.41
  Bottom 0.8: 118.73,28.41 117.46,28.41
S$184
  Bottom 0.4: 121.27,28.41 120.64,28.41 119.36,27.14 114.92,27.14 113.65,28.41 97.54,28.41
  Bottom 0.8: 96.27,28.41 97.54,28.41
S$185
  Bottom 0.4: 93.73,25.87 94.36,25.87 95.64,27.14 113.65,27.14 114.92,25.87 117.46,25.87
  Bottom 0.8: 118.73,25.87 117.46,25.87
S$186
  Bottom 0.4: 121.27,25.87 120.64,25.87 119.36,24.6 114.92,24.6 113.65,25.87 97.54,25.87
  Bottom 0.8: 96.27,25.87 97.54,25.87
S$187
  Bottom 0.4: 93.73,23.33 94.36,23.33 95.64,24.6 113.65,24.6 114.92,23.33 117.46,23.33
  Bottom 0.8: 118.73,23.33 117.46,23.33
S$188
  Bottom 0.4: 121.27,23.33 120.64,23.33 119.36,22.06 114.92,22.06 113.65,23.33 97.54,23.33
  Bottom 0.8: 96.27,23.33 97.54,23.33
S$189
  Bottom 1: 118.73,81.75 121.27,81.75 143.73,81.75
S$190
  Bottom 1: 118.73,18.25 121.27,18.25 143.73,18.25
S$191
  Bottom 0.4: 122.54,63.97 142.46,63.97
  Bottom 0.8: 121.27,63.97 122.54,63.97 | 142.46,63.97 143.73,63.97
S$192  (via drill 0.8 pad 1.5)
  Bottom 0.4: 122.54,20.79 v127.62,20.79
  Bottom 0.8: 121.27,20.79 122.54,20.79
S$193  (via drill 0.8 pad 1.5)
  Bottom 0.4: 142.46,20.79 v134.84,20.79
  Bottom 0.8: 143.73,20.79 142.46,20.79
S$194
  Bottom 0.4: 118.73,79.21 119.36,79.21 120.64,80.48 138.65,80.48 139.92,79.21 142.46,79.21
  Bottom 0.8: 143.73,79.21 142.46,79.21
S$195
  Bottom 0.4: 146.27,79.21 145.63,79.21 144.37,77.94 139.92,77.94 138.65,79.21 122.54,79.21
  Bottom 0.8: 121.27,79.21 122.54,79.21
S$196
  Bottom 0.4: 118.73,76.67 119.36,76.67 120.64,77.94 138.65,77.94 139.92,76.67 142.46,76.67
  Bottom 0.8: 143.73,76.67 142.46,76.67
S$197
  Bottom 0.4: 146.27,76.67 145.63,76.67 144.37,75.4 139.92,75.4 138.65,76.67 122.54,76.67
  Bottom 0.8: 121.27,76.67 122.54,76.67
S$198
  Bottom 0.4: 118.73,74.13 119.36,74.13 120.64,75.4 138.65,75.4 139.92,74.13 142.46,74.13
  Bottom 0.8: 143.73,74.13 142.46,74.13
S$199
  Bottom 0.4: 146.27,74.13 145.63,74.13 144.37,72.86 139.92,72.86 138.65,74.13 122.54,74.13
  Bottom 0.8: 121.27,74.13 122.54,74.13
S$200
  Bottom 0.4: 118.73,71.59 119.36,71.59 120.64,72.86 138.65,72.86 139.92,71.59 142.46,71.59
  Bottom 0.8: 143.73,71.59 142.46,71.59
S$201
  Bottom 0.4: 146.27,71.59 145.63,71.59 144.37,70.32 139.92,70.32 138.65,71.59 122.54,71.59
  Bottom 0.8: 121.27,71.59 122.54,71.59
S$202
  Bottom 0.4: 118.73,69.05 119.36,69.05 120.64,70.32 138.65,70.32 139.92,69.05 142.46,69.05
  Bottom 0.8: 143.73,69.05 142.46,69.05
S$203
  Bottom 0.4: 146.27,69.05 145.63,69.05 144.37,67.78 139.92,67.78 138.65,69.05 122.54,69.05
  Bottom 0.8: 121.27,69.05 122.54,69.05
S$204
  Bottom 0.4: 118.73,66.51 119.36,66.51 120.64,67.78 138.65,67.78 139.92,66.51 142.46,66.51
  Bottom 0.8: 143.73,66.51 142.46,66.51
S$205
  Bottom 0.4: 146.27,66.51 145.63,66.51 144.37,65.24 139.92,65.24 138.65,66.51 122.54,66.51
  Bottom 0.8: 121.27,66.51 122.54,66.51
S$206
  Bottom 0.4: 118.73,61.43 119.36,61.43 120.64,62.7 138.65,62.7 139.92,61.43 142.46,61.43
  Bottom 0.8: 143.73,61.43 142.46,61.43
S$207
  Bottom 0.4: 146.27,61.43 145.63,61.43 144.37,60.16 139.92,60.16 138.65,61.43 122.54,61.43
  Bottom 0.8: 121.27,61.43 122.54,61.43
S$208
  Bottom 0.4: 118.73,58.89 119.36,58.89 120.64,60.16 138.65,60.16 139.92,58.89 142.46,58.89
  Bottom 0.8: 143.73,58.89 142.46,58.89
S$209
  Bottom 0.4: 146.27,58.89 145.63,58.89 144.37,57.62 139.92,57.62 138.65,58.89 122.54,58.89
  Bottom 0.8: 121.27,58.89 122.54,58.89
S$210
  Bottom 0.4: 118.73,56.35 119.36,56.35 120.64,57.62 138.65,57.62 139.92,56.35 142.46,56.35
  Bottom 0.8: 143.73,56.35 142.46,56.35
S$211
  Bottom 0.4: 146.27,56.35 145.63,56.35 144.37,55.08 139.92,55.08 138.65,56.35 122.54,56.35
  Bottom 0.8: 121.27,56.35 122.54,56.35
S$212
  Bottom 0.4: 118.73,53.81 119.36,53.81 120.64,55.08 138.65,55.08 139.92,53.81 142.46,53.81
  Bottom 0.8: 143.73,53.81 142.46,53.81
S$213
  Bottom 0.4: 146.27,53.81 145.63,53.81 144.37,52.54 139.92,52.54 138.65,53.81 122.54,53.81
  Bottom 0.8: 121.27,53.81 122.54,53.81
S$214
  Bottom 0.4: 93.73,33.49 94.36,33.49 95.64,34.76 113.65,34.76 114.92,33.49 117.46,33.49
  Bottom 0.8: 118.73,33.49 117.46,33.49
S$215
  Bottom 0.4: 118.73,36.03 119.36,36.03 120.64,37.3 138.65,37.3 139.92,36.03 142.46,36.03
  Bottom 0.8: 143.73,36.03 142.46,36.03
S$216
  Bottom 0.4: 118.73,48.73 119.36,48.73 120.64,50 138.65,50 139.92,48.73 142.46,48.73
  Bottom 0.8: 143.73,48.73 142.46,48.73
S$217
  Bottom 0.4: 146.27,48.73 145.63,48.73 144.37,47.46 139.92,47.46 138.65,48.73 122.54,48.73
  Bottom 0.8: 121.27,48.73 122.54,48.73
S$218
  Bottom 0.4: 118.73,46.19 119.36,46.19 120.64,47.46 138.65,47.46 139.92,46.19 142.46,46.19
  Bottom 0.8: 143.73,46.19 142.46,46.19
S$219
  Bottom 0.4: 146.27,46.19 145.63,46.19 144.37,44.92 139.92,44.92 138.65,46.19 122.54,46.19
  Bottom 0.8: 121.27,46.19 122.54,46.19
S$220
  Bottom 0.4: 118.73,43.65 119.36,43.65 120.64,44.92 138.65,44.92 139.92,43.65 142.46,43.65
  Bottom 0.8: 143.73,43.65 142.46,43.65
S$221
  Bottom 0.4: 146.27,43.65 145.63,43.65 144.37,42.38 139.92,42.38 138.65,43.65 122.54,43.65
  Bottom 0.8: 121.27,43.65 122.54,43.65
S$222
  Bottom 0.4: 118.73,41.11 119.36,41.11 120.64,42.38 138.65,42.38 139.92,41.11 142.46,41.11
  Bottom 0.8: 143.73,41.11 142.46,41.11
S$223
  Bottom 0.4: 146.27,41.11 145.63,41.11 144.37,39.84 139.92,39.84 138.65,41.11 122.54,41.11
  Bottom 0.8: 121.27,41.11 122.54,41.11
S$224
  Bottom 0.4: 118.73,38.57 119.36,38.57 120.64,39.84 138.65,39.84 139.92,38.57 142.46,38.57
  Bottom 0.8: 143.73,38.57 142.46,38.57
S$225
  Bottom 0.4: 146.27,38.57 145.63,38.57 144.37,37.3 139.92,37.3 138.65,38.57 122.54,38.57
  Bottom 0.8: 121.27,38.57 122.54,38.57
S$226
  Bottom 0.4: 118.73,30.95 119.36,30.95 120.64,32.22 138.65,32.22 139.92,30.95 142.46,30.95
  Bottom 0.8: 143.73,30.95 142.46,30.95
S$227
  Bottom 0.4: 146.27,36.03 145.63,36.03 144.37,34.76 139.92,34.76 138.65,36.03 122.54,36.03
  Bottom 0.8: 121.27,36.03 122.54,36.03
S$228
  Bottom 0.4: 146.27,33.49 145.63,33.49 144.37,32.22 139.92,32.22 138.65,33.49 122.54,33.49
  Bottom 0.8: 121.27,33.49 122.54,33.49
S$229
  Bottom 0.4: 146.27,30.95 145.63,30.95 144.37,29.68 139.92,29.68 138.65,30.95 122.54,30.95
  Bottom 0.8: 121.27,30.95 122.54,30.95
S$230
  Bottom 0.4: 118.73,28.41 119.36,28.41 120.64,29.68 138.65,29.68 139.92,28.41 142.46,28.41
  Bottom 0.8: 143.73,28.41 142.46,28.41
S$231
  Bottom 0.4: 146.27,28.41 145.63,28.41 144.37,27.14 139.92,27.14 138.65,28.41 122.54,28.41
  Bottom 0.8: 121.27,28.41 122.54,28.41
S$232
  Bottom 0.4: 118.73,25.87 119.36,25.87 120.64,27.14 138.65,27.14 139.92,25.87 142.46,25.87
  Bottom 0.8: 143.73,25.87 142.46,25.87
S$233
  Bottom 0.4: 146.27,25.87 145.63,25.87 144.37,24.6 139.92,24.6 138.65,25.87 122.54,25.87
  Bottom 0.8: 121.27,25.87 122.54,25.87
S$234
  Bottom 0.4: 118.73,23.33 119.36,23.33 120.64,24.6 138.65,24.6 139.92,23.33 142.46,23.33
  Bottom 0.8: 143.73,23.33 142.46,23.33
S$235
  Bottom 0.4: 146.27,23.33 145.63,23.33 144.37,22.06 139.92,22.06 138.65,23.33 122.54,23.33
  Bottom 0.8: 121.27,23.33 122.54,23.33
S$236
  Bottom 0.4: 118.73,33.49 119.36,33.49 120.64,34.76 138.65,34.76 139.92,33.49 142.46,33.49
  Bottom 0.8: 143.73,33.49 142.46,33.49
S$237  (via drill 1.2 pad 3)
  Bottom 1.2: 143.7,18.3 146.3,18.3 146.3,18.2 149.2,18.2 153,22 153,35 152,36 152,43 v155,46
S$238  (via drill 1.2 pad 3)
  Bottom 1.2: 143.7,81.8 149.2,81.8 152,79 152,59 v155,56
S$239  (via drill 0.5 pad 3)
  other vias: 10,90
S$240  (via drill 0.5 pad 3)
  other vias: 150,90
S$241  (via drill 0.5 pad 3)
  other vias: 10,10
S$242  (via drill 0.5 pad 3)
  other vias: 150,10
S$243  (via drill 0.5 pad 3)
  other vias: 107.5,90
S$244  (via drill 0.5 pad 3)
  other vias: 57.5,90
S$245  (via drill 0.5 pad 3)
  other vias: 107.5,10
S$246  (via drill 0.5 pad 3)
  other vias: 57.5,10

## Text on the board
Bottom: KRAMER MC backplane | 3 | 4 | 4 | 5 | 5 | 6 | 6 | 7 | 7 | 8 | 8 | 9 | 9 | 10 | 10 | 11 | 11 | 12 | 12 | 13 | 13 | 14 | 14 | 15 | 16 | 16 | 17 | 17 | 18 | 18 | 19 | 19 | +5 5G -5 +12 GND | 20 | 20 | 21 | 21 | 22 | 22 | 23 | 23 | 24 | 24 | 25 | 25 | 26 | 26 | 27 | 27 | 28 | redesign by ferryTALE 2020
bRestrict: B | A | 1 | GND | 2 | 29 | 30 | +5V | B | A